# Altium PCB JOY.PcbDoc
Units mil, origin at the board's own origin, x right, y up, seen from the top; angles counter-clockwise.
Board outline 1068.03 x 1488.03 mil, 2 copper layers (Top Layer, Bottom Layer); 2 components, 6 nets, 28 pads, 2 vias.
Unrouted connection lines stored in the file: 3.
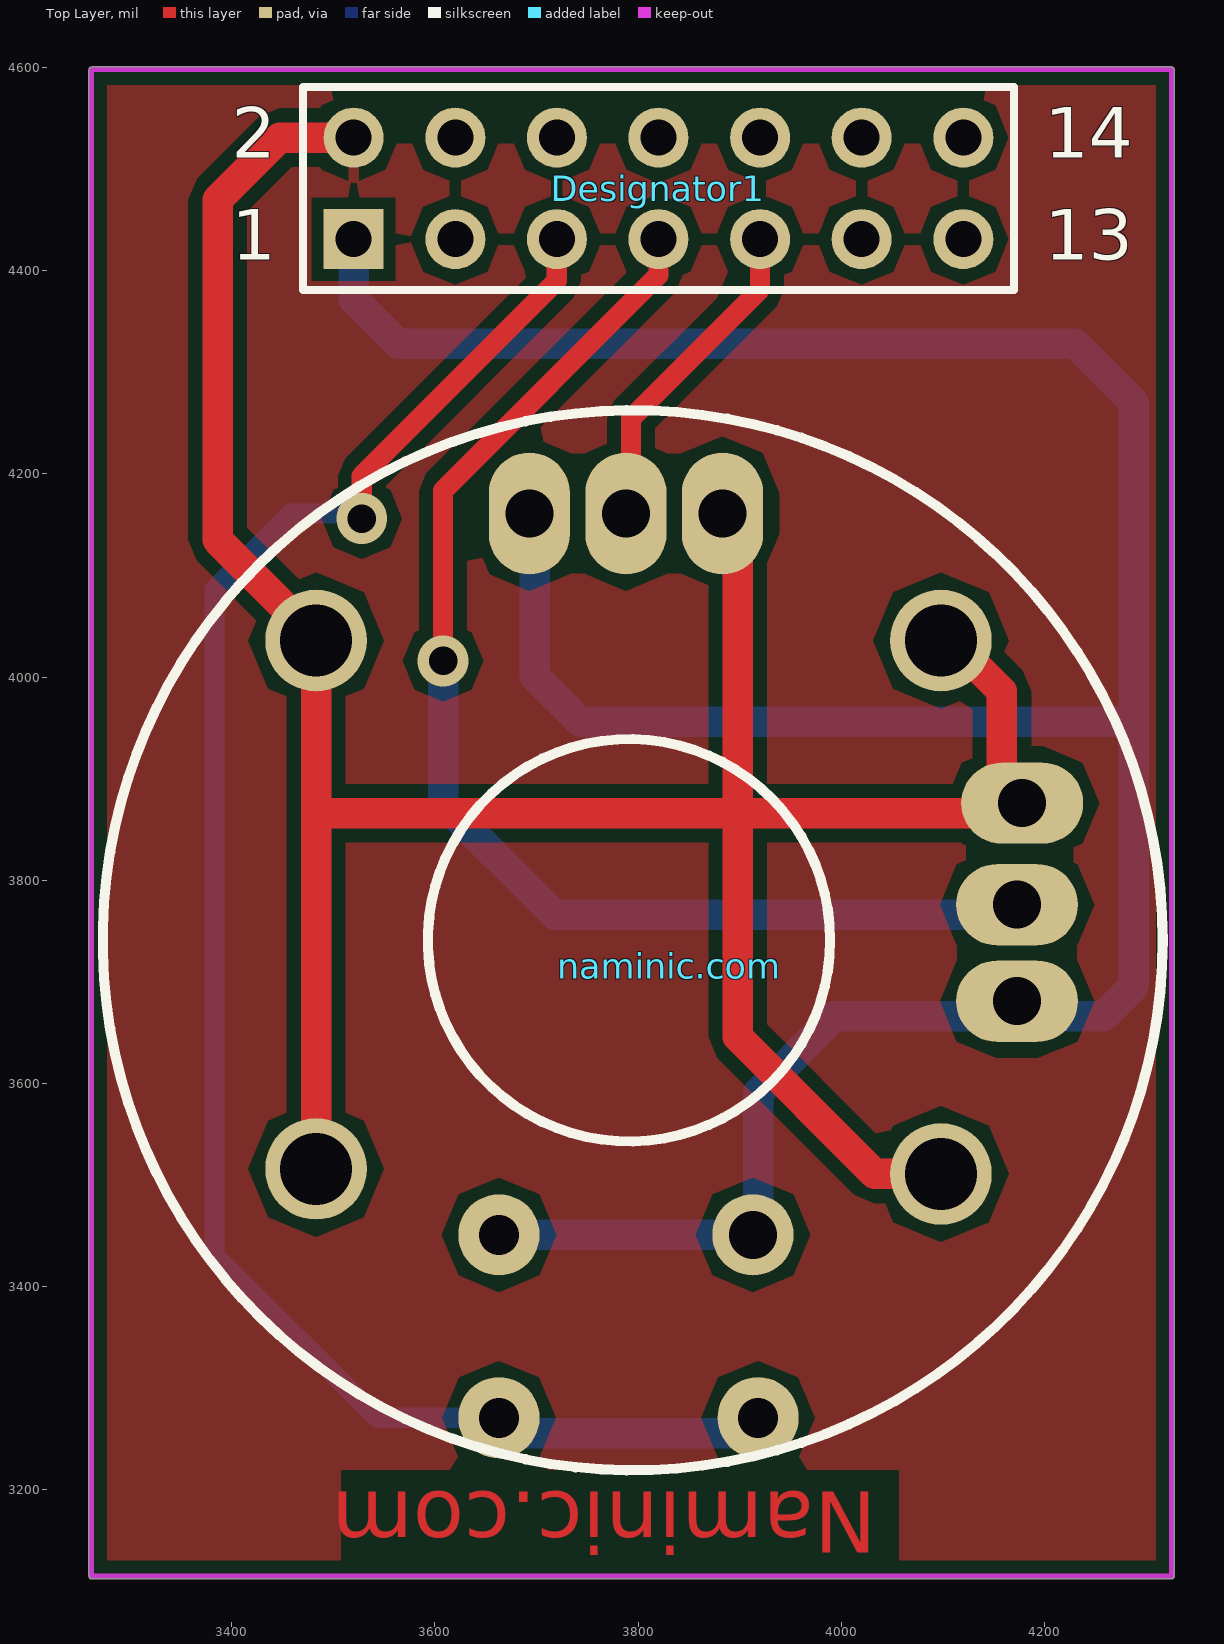
[diagram p0: Top Layer view]
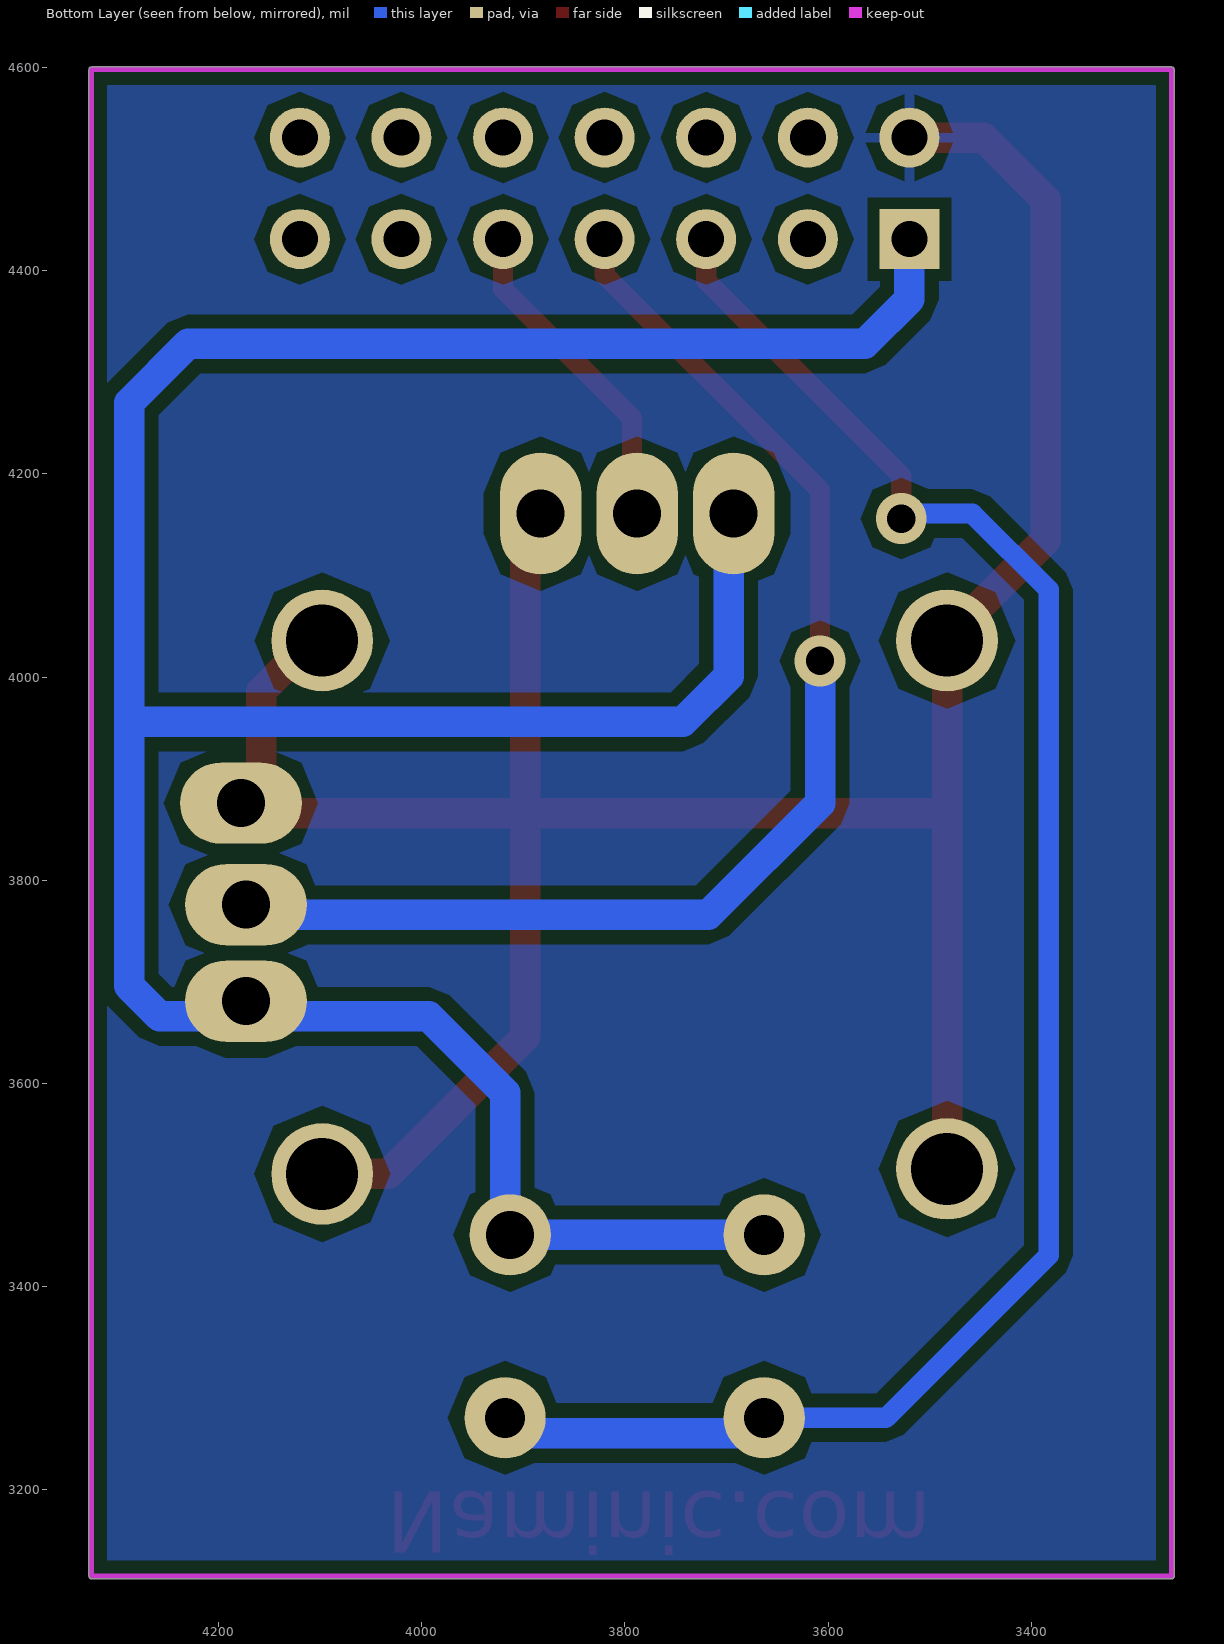
[diagram p1: Bottom Layer view, seen from below]

## Layer stack, top to bottom
Top Layer: signal copper 1.4
Dielectric: dielectric 12.6, FR-4, Dk 4.8
Bottom Layer: signal copper 1.4

## Board outline
4327.52,4598 ccw(c4325,4598) 4325,4600.52 3262,4600.52 ccw(c3262,4598) 3259.49,4598 3259.49,3115 ccw(c3262,3115) 3262,3112.49 4325,3112.49 ccw(c4325,3115) 4327.52,3115

## Design rules (kind name [scope] priority, off if disabled: settings)
Clearance [All] p1: gap=12
FabricationTestPointUsage TestPointUsage [All] p1: valid=0 allowmultiple=FALSE
FabricationTestpoint Testpoint [All] p1: side=3 testpointundercomponent=TRUE minsize=40 maxsize=100 preferedsize=60 minholesize=0 maxholesize=40 preferedholesize=32 testpointgrid=1 allowsidetop=TRUE allowsidebottom=TRUE usegrid=TRUE gridtolerance=0.01
HoleSize [All] p1 off: absolutevalues=TRUE maxlimit=100 minlimit=1 maxpercent=80.000 minpercent=20.000
PolygonConnect [All] p1: connectstyle=Relief reliefconductorwidth=10 reliefentries=4 polygonreliefangle="90 Angle"
RoutingVias [All] p1: holewidth=28 width=50 viastyle="Through Hole" minholewidth=28 minwidth=50 maxholewidth=28 maxwidth=50
SilkscreenOverComponentPads SilkToSolderMaskClearance [IsPad] p1: minsilkscreentomaskgap=10
SolderMaskExpansion [All] p1: expansion=4
Width [All] p1: maxlimit=100 minlimit=12 preferedwidth=30
24 further rules are at their usual default settings.

## Components (designator, comment, footprint, x,y, rotation, side; value= is the part's Value field where it differs from the comment)
Designator1 "Comment" HDR2X7 3520,4431 r0 top
naminic.com "Comment" JOY 4073,4081 r180 top

## Footprints (in the part's own frame and the unit in brackets; to place one, negate y for a bottom-side part, rotate by r counter-clockwise, add the part's x,y. Pads: shape width x height; smd on the part's side, far side on the other; paste and mask are expansions set on the pad)
HDR2X7 [mm] "Connector; Header; 7x2 Position"
  rect 1.5x1.5 hole 0.9: 1(0,0)
  round 1.5 hole 0.9: 2(0,2.54) 3(2.54,0) 4(2.54,2.54) 5(5.08,0) 6(5.08,2.54) 7(7.62,0) 8(7.62,2.54) 9(10.16,0) 10(10.16,2.54) 11(12.7,0) 12(12.7,2.54) 13(15.24,0) 14(15.24,2.54)
  silkscreen extent -1.27,-1.27 16.51,3.81
JOY [mil]
  oval 120x80 hole 47.24: 1(-100,400) 2(-105,205) 4(-100,305)
  round 80 hole 47.24: 1(160,630)
  oval 80x120 hole 47.24: 1(380,-80) 2(190,-80) 3(285,-80)
  round 80 hole 39.37: 1(410,630) 5(155,810) 5(410,810)
  round 100 hole 70.87: 2(-25,570) 2(-25,45) 2(590,565) 2(590,45)
  silkscreen extent -243,-182 800,862, body extent -230,-206 805,937, height 1219

## Via types
v1: diameter 50, hole 28, Top Layer to Bottom Layer, 2 vias

## Nets (pads, with @x,y where several pads share a name; then routed paths per layer and width w, separated by ;. In a path a pad name is that pad's centre, name@x,y a point inside that pad or via, vN(x,y) a via of type N, cw(c..) or ccw(c..) an arc to the next point about the centre after c; other vN are vias at no path point)
3.3: Designator1.1 | length 2990.4
  Bottom Layer w30: Designator1.1 3520,4372 3564,4328 4230,4328 4288,4270 4288,3956 ; 3673,3451 3913,3451 ; 3698,4146 3698,4001 3743,3956 4288,3956 ; 3918,3451 3918,3591 3993,3666 4258,3666 4288,3696 4288,3956
GND: Designator1.2 | length 2689.5
  Top Layer w30: 3386,4135 3386,4470 3447,4531 Designator1.2 ; 3483,3516 3483,4036 ; 3483,3861 3488,3866 3898,3866 ; 3883,4146 3898,4131 3898,3866 ; 4103,4041 4158,3986 4158,3866 3898,3866 ; 4108,3511 4033,3511 3898,3646 3898,3866
  Bottom Layer w20: 4078,4066 4098,4046
NetPJ2_1: 
NetPJ2_2: Designator1.7 | length 1238.4
  Top Layer w20: v1(3608,4016) 3608,4183.68 3820,4395.68 Designator1.7
  Bottom Layer w30: v1(3608,4016) 3608,3876 3718,3766 4158,3766
NetPJ2_3: 
NetPJ_5: Designator1.5 | length 591.6
  Top Layer w20: 3528,4156 3528,4198 3720,4390 Designator1.5
  Bottom Layer w30: 3678,3256 3908,3256 3913,3251
pads on no net: Designator1.3 Designator1.4 Designator1.6 Designator1.8 Designator1.9 Designator1.10 Designator1.11 Designator1.12 Designator1.13 Designator1.14 naminic.com.1 naminic.com.2 naminic.com.3 naminic.com.4 naminic.com.5
copper on no net: | length 1615.1
  Top Layer w20: v1(3528,4156) v1@3528,4178 ; 3793,4201 3793,4235 3793,4255 3920,4382 3920,4420
  Top Layer w30: 3386,4135 3483,4038 3483,4036
  Bottom Layer w20: v1@3528,4161 3458,4161 3383,4086 3383,3431 3543,3271 3663,3271
  Bottom Layer w30: 3693,4161 3693,4166

## Polygon pours and split planes (outlines as drawn)
GND on Bottom Layer "Top Layer-No Net" (solid, pour order 0): 4314,3115 3262,3115 3262,4590.02 3269.92,4598 3272.89,4595.01 4314,4595.01 4314,3115
GND on Top Layer "Top Layer-No Net" (solid, pour order 4): 4325,3115 3262,3115 3262,4598 4318,4598 4325,4591 4325,3115

## Keep-outs
Keep-Out Layer:
  lines w5: 3262,3115 3262,4598 4325,4598 4325,3115 3262,3115

## Other copper
Top Layer:
  text "Naminic.com" at 4035,3198 h60 r180

## Text inside footprints (layer, text, board x,y; h text height)
Designator1: Top Overlay "2" at 3400,4511 h50; Top Overlay "1" at 3400,4411 h50; Top Overlay "14" at 4200,4511 h50; Top Overlay "13" at 4200,4411 h50